# Altium PCB PCB1.PcbDoc
Units mil, origin at the board's own origin, x right, y up, seen from the top; angles counter-clockwise.
Board outline 3490.03 x 1315.02 mil, 2 copper layers (Top Layer, Bottom Layer); 35 components, 58 nets, 194 pads, 0 vias.
Unrouted connection lines stored in the file: 131.
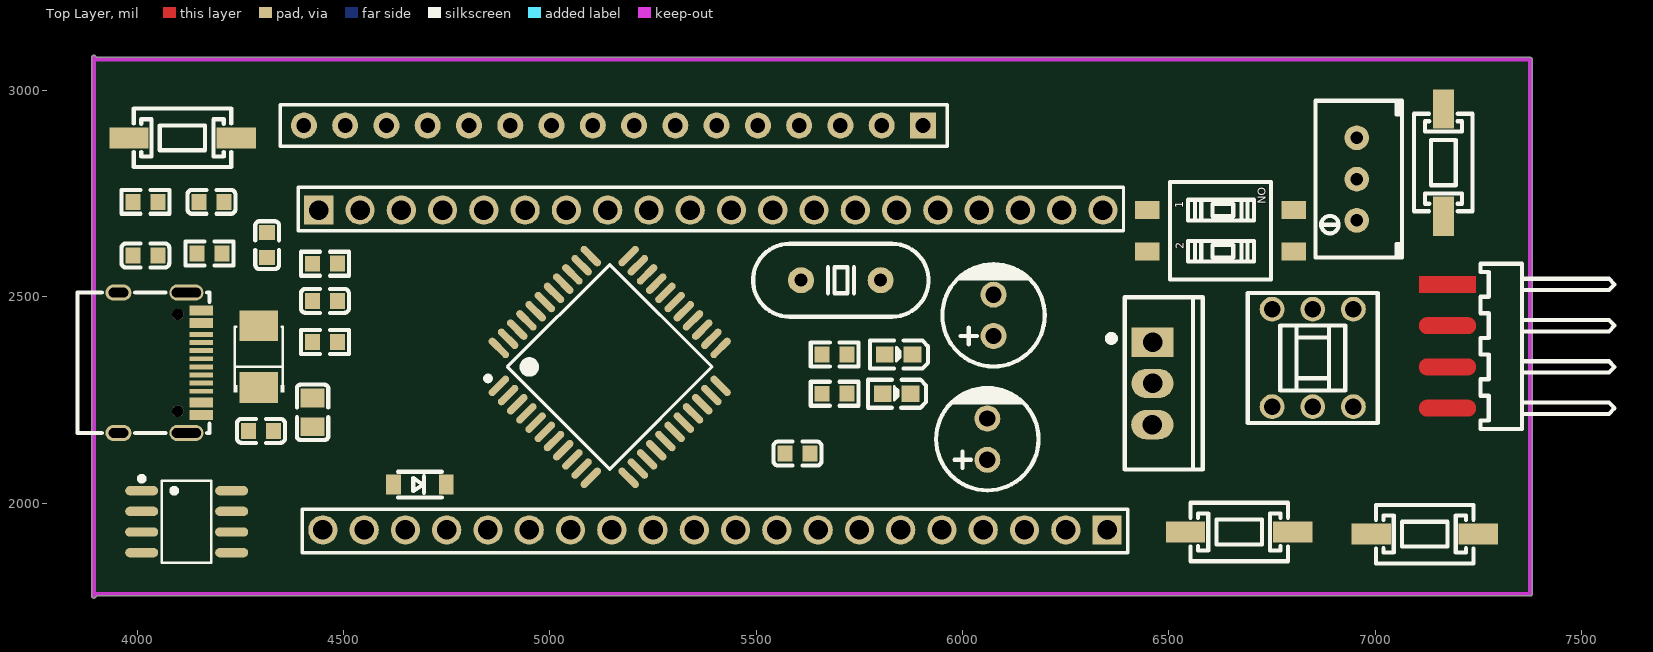
[diagram p0: Top Layer view]
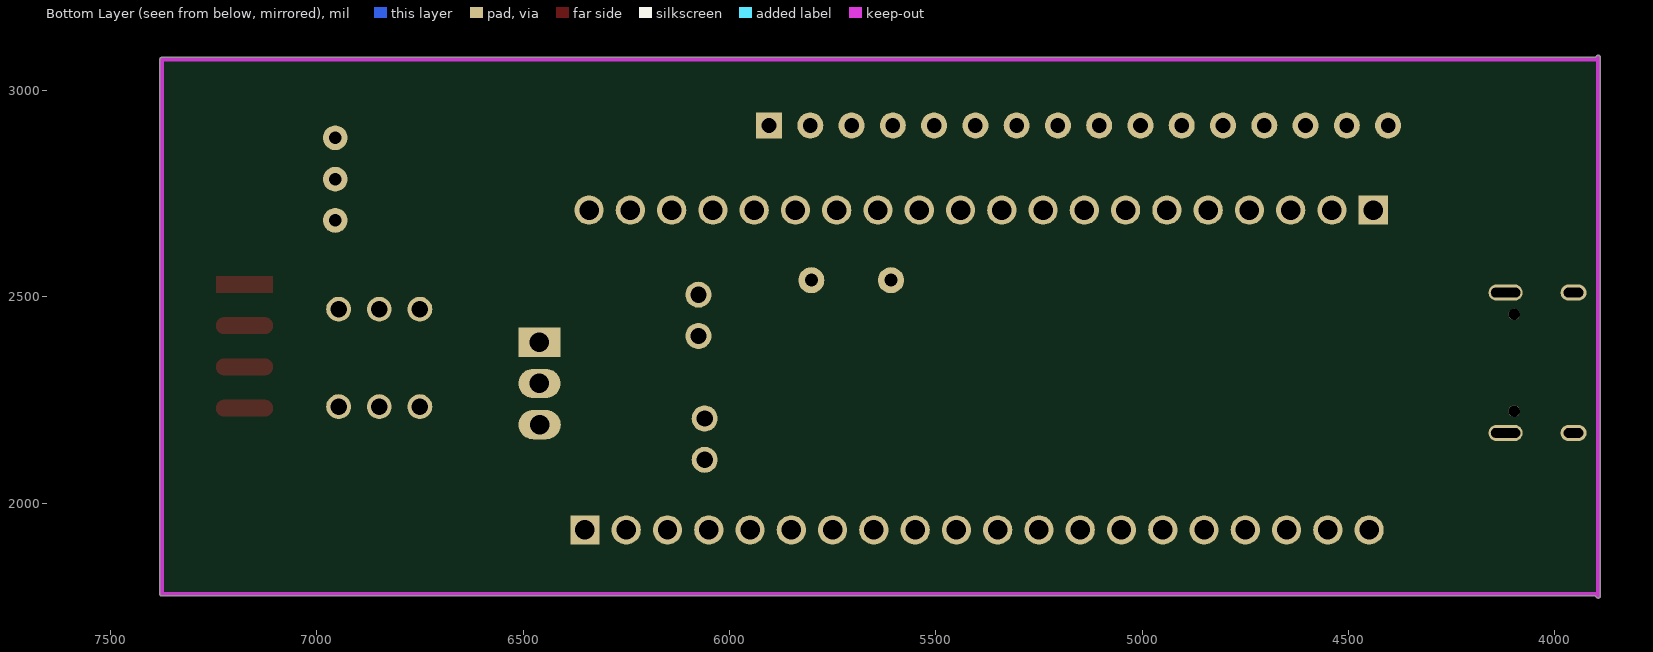
[diagram p1: Bottom Layer view, seen from below]

## Layer stack, top to bottom
Top Layer: signal copper 1.4
Dielectric: dielectric 12.6, FR-4, Dk 4.8
Bottom Layer: signal copper 1.4

## Board outline
3889.99,1775 ccw(c3895,1775) 3898.56,1771.47 3898.55,1771.45 3902.08,1774.98 7375,1774.98 ccw(c7375,1780) 7380.02,1780 7380.02,3075 ccw(c7375,3075) 7375,3080.01 3902.08,3080.01 3898.55,3083.55 3898.56,3083.53 ccw(c3895,3080) 3889.99,3080

## Design rules (kind name [scope] priority, off if disabled: settings)
Clearance [All] p1: gap=10
PolygonConnect [All] p1: connectstyle=Relief reliefconductorwidth=10 reliefentries=4 polygonreliefangle="90 Angle" airgapwidth=10
RoutingVias [All] p1: holewidth=28 width=50 viastyle="Through Hole" minholewidth=28 minwidth=50 maxholewidth=28 maxwidth=50
SolderMaskExpansion [All] p1: expansion=4
Width [All] p1: maxlimit=10 minlimit=10 preferedwidth=10
28 further rules are at their usual default settings.

## Classes and differential pairs
component class Sheet1: ""

## Components (designator, comment, footprint, x,y, rotation, side; value= is the part's Value field where it differs from the comment)
C1 "0.1u" C0603 4180,2730 r180 top
C2 "0.1u" C0603 4020,2600 r0 top
C3 "100nF" C0603 4455,2490 r0 top
C4 "22pF" C0603 5600,2120 r0 top
C5 "22pF" C0603 4300,2175 r0 top
C6 "10uF" C0603 4315,2625 r270 top
C7 "1uF" CAP-SMD_L3.5-W2.8-R-RD 4295,2355 r90 top
C8 "47uF" CAP-TH_BD6.3-P2.50-D1.0-FD 6060,2155 r90 top
C9 "47uF" CAP-TH_BD6.3-P2.50-D1.0-FD 6075,2455 r90 top
D2 "B5819WS_C122855" SOD-123 4685,2045 r0 top
J1 "" HDR-TH_20P-P2.54-V-M-1 5400,1935 r180 top
J2 "" HDR-TH_20P-P2.54-V-M-1 5390,2710 r0 top
JP2 "CON-4P" HDR2.54-WS-4P 7175,2380 r270 top
LCD "LCM1602K" HDR-TH_16P-P2.54-V-F-1 5155,2915 r180 top
LED1 "ORH-R36A(0.6T)" LED-0603 5845,2360 r180 top
LED2 "ORH-R36A(0.6T)" LED-0603 5840,2265 r180 top
R1 "5.1k" R0603 4020,2730 r0 top
R2 "5.1k" R0603 4455,2580 r180 top
R3 "1.5K" R0603 5690,2265 r0 top
R4 "1.5K" R0603 5690,2360 r0 top
R5 "300" R0603 4175,2605 r0 top
R6 "10K" C0805 4425,2220 r90 top
R7 "10K" RES-ADJ-TH_3296W 6955,2785 r180 top
R8 "200" R0603 4455,2390 r180 top
S1 "" SW-SMD_L6.0-W3.5-LS8.2 7165,2825 r270 top
S2 "" SW-SMD_L6.0-W3.5-LS8.2 6670,1930 r180 top
S3 "" SW-SMD_L6.0-W3.5-LS8.2 7120,1925 r0 top
SW1 "ST-1186S" SW-SMD_L6.0-W3.5-LS8.2 4110,2885 r0 top
SW2 "XKB8080-Z" SW-TH_6PIN-L8.00-W8.00 6850,2350 r0 top
TYPE-C "TYPEC-304-BCP16" TYPEC-16P 4055,2340 r270 top
U1 "CH340N" SOP-8_L5.0-W4.0-P1.27-LS6.0-BL 4120,1955 r270 top
U2 "STC12C5A60S2-35I" LQFP-44_10X10X08P 5145,2330 r45 top
U3 "DSIC02LSGET" SW-SMD_4P-L6.0-W6.2-P2.54-LS9.8 6625,2660 r0 top
U4 "LM7805T" TO-220-3_L10.0-W4.5-P2.54-L 6460,2290 r270 top
X1 "11.0592MHz" OSC-S49S 5705,2540 r180 top

## Footprints (in the part's own frame and the unit in brackets; to place one, negate y for a bottom-side part, rotate by r counter-clockwise, add the part's x,y. Pads: shape width x height; smd on the part's side, far side on the other; paste and mask are expansions set on the pad)
C0603 [mil]
  rect 36.61x38.58 smd: 1(-30.35,-0.1) 2(30.34,0.1)
  silkscreen extent -58,-29 58,29
C0805 [mil]
  rect 45.67x57.87 smd: 1(-35,0) 2(35,0)
  silkscreen extent -67,-38 67,38
CAP-SMD_L3.5-W2.8-R-RD [mm]
  rect 1.9x2.376 smd: 1(-1.899,0) 2(1.899,0)
  silkscreen extent -2.21,-1.55 1.83,1.55
CAP-TH_BD6.3-P2.50-D1.0-FD [mm]
  round 1.6 hole 1: 1(-1.27,0) 2(1.27,0)
  silkscreen extent -3.15,-3.15 3.18,3.15
HDR2.54-WS-4P [mil]
  round 0 smd: 1(-150,0) 2(-50,0) 3(50,0) 4(150,0)
  Top Layer region: 29.92,48.82 29.95,49.8 30.02,50.79 30.14,51.77 30.31,52.74 30.52,53.7 30.79,54.65 31.09,55.58 31.45,56.5 31.85,57.4 32.29,58.28 32.78,59.14 33.3,59.97 33.87,60.78 34.48,61.56 35.12,62.3 35.8,63.02 36.52,63.7 37.26,64.34 38.04,64.95 38.84,65.51 39.68,66.04 40.53,66.53 41.41,66.97 42.32,67.37 43.24,67.72 44.17,68.03 45.12,68.3 46.08,68.51 47.05,68.68 48.03,68.8 49.01,68.87 50,68.9 50.99,68.87 51.97,68.8 52.95,68.68 53.92,68.51 54.88,68.3 55.83,68.03 56.76,67.72 57.68,67.37 58.59,66.97 59.47,66.53 60.32,66.04 61.16,65.51 61.96,64.95 62.74,64.34 63.48,63.7 64.2,63.02 64.88,62.3 65.52,61.56 66.13,60.78 66.7,59.97 67.22,59.14 67.71,58.28 68.15,57.4 68.55,56.5 68.91,55.58 69.21,54.65 69.48,53.7 69.69,52.74 69.86,51.77 69.98,50.79 70.05,49.8 70.08,48.82 70.08,-48.82 70.05,-49.8 69.98,-50.79 69.86,-51.77 69.69,-52.74 69.48,-53.7 69.21,-54.65 68.91,-55.58 68.55,-56.5 68.15,-57.4 67.71,-58.28 67.22,-59.14 66.7,-59.97 66.13,-60.78 65.52,-61.56 64.88,-62.3 64.2,-63.02 63.48,-63.7 62.74,-64.34 61.96,-64.95 61.16,-65.51 60.32,-66.04 59.47,-66.53 58.59,-66.97 57.68,-67.37 56.76,-67.72 55.83,-68.03 54.88,-68.3 53.92,-68.51 52.95,-68.68 51.97,-68.8 50.99,-68.87 50,-68.9 49.01,-68.87 48.03,-68.8 47.05,-68.68 46.08,-68.51 45.12,-68.3 44.17,-68.03 43.24,-67.72 42.32,-67.37 41.41,-66.97 40.53,-66.53 39.68,-66.04 38.84,-65.51 38.04,-64.95 37.26,-64.34 36.52,-63.7 35.8,-63.02 35.12,-62.3 34.48,-61.56 33.87,-60.78 33.3,-59.97 32.78,-59.14 32.29,-58.28 31.85,-57.4 31.45,-56.5 31.09,-55.58 30.79,-54.65 30.52,-53.7 30.31,-52.74 30.14,-51.77 30.02,-50.79 29.95,-49.8 29.92,-48.82
  Top Layer region: -70.08,48.82 -70.05,49.8 -69.98,50.79 -69.86,51.77 -69.69,52.74 -69.48,53.7 -69.21,54.65 -68.91,55.58 -68.55,56.5 -68.15,57.4 -67.71,58.28 -67.22,59.14 -66.7,59.97 -66.13,60.78 -65.52,61.56 -64.88,62.3 -64.2,63.02 -63.48,63.7 -62.74,64.34 -61.96,64.95 -61.16,65.51 -60.32,66.04 -59.47,66.53 -58.59,66.97 -57.68,67.37 -56.76,67.72 -55.83,68.03 -54.88,68.3 -53.92,68.51 -52.95,68.68 -51.97,68.8 -50.99,68.87 -50,68.9 -49.01,68.87 -48.03,68.8 -47.05,68.68 -46.08,68.51 -45.12,68.3 -44.17,68.03 -43.24,67.72 -42.32,67.37 -41.41,66.97 -40.53,66.53 -39.68,66.04 -38.84,65.51 -38.04,64.95 -37.26,64.34 -36.52,63.7 -35.8,63.02 -35.12,62.3 -34.48,61.56 -33.87,60.78 -33.3,59.97 -32.78,59.14 -32.29,58.28 -31.85,57.4 -31.45,56.5 -31.09,55.58 -30.79,54.65 -30.52,53.7 -30.31,52.74 -30.14,51.77 -30.02,50.79 -29.95,49.8 -29.92,48.82 -29.92,-48.82 -29.95,-49.8 -30.02,-50.79 -30.14,-51.77 -30.31,-52.74 -30.52,-53.7 -30.79,-54.65 -31.09,-55.58 -31.45,-56.5 -31.85,-57.4 -32.29,-58.28 -32.78,-59.14 -33.3,-59.97 -33.87,-60.78 -34.48,-61.56 -35.12,-62.3 -35.8,-63.02 -36.52,-63.7 -37.26,-64.34 -38.04,-64.95 -38.84,-65.51 -39.68,-66.04 -40.53,-66.53 -41.41,-66.97 -42.32,-67.37 -43.24,-67.72 -44.17,-68.03 -45.12,-68.3 -46.08,-68.51 -47.05,-68.68 -48.03,-68.8 -49.01,-68.87 -50,-68.9 -50.99,-68.87 -51.97,-68.8 -52.95,-68.68 -53.92,-68.51 -54.88,-68.3 -55.83,-68.03 -56.76,-67.72 -57.68,-67.37 -58.59,-66.97 -59.47,-66.53 -60.32,-66.04 -61.16,-65.51 -61.96,-64.95 -62.74,-64.34 -63.48,-63.7 -64.2,-63.02 -64.88,-62.3 -65.52,-61.56 -66.13,-60.78 -66.7,-59.97 -67.22,-59.14 -67.71,-58.28 -68.15,-57.4 -68.55,-56.5 -68.91,-55.58 -69.21,-54.65 -69.48,-53.7 -69.69,-52.74 -69.86,-51.77 -69.98,-50.79 -70.05,-49.8 -70.08,-48.82
  Top Layer region: -129.92,-68.9 -170.08,-68.9 -170.08,68.9 -129.92,68.9
  Top Layer region: 129.92,48.82 129.95,49.8 130.02,50.79 130.14,51.77 130.31,52.74 130.52,53.7 130.79,54.65 131.09,55.58 131.45,56.5 131.85,57.4 132.29,58.28 132.78,59.14 133.3,59.97 133.87,60.78 134.48,61.56 135.12,62.3 135.8,63.02 136.52,63.7 137.26,64.34 138.04,64.95 138.84,65.51 139.68,66.04 140.53,66.53 141.41,66.97 142.32,67.37 143.24,67.72 144.17,68.03 145.12,68.3 146.08,68.51 147.05,68.68 148.03,68.8 149.01,68.87 150,68.9 150.99,68.87 151.97,68.8 152.95,68.68 153.92,68.51 154.88,68.3 155.83,68.03 156.76,67.72 157.68,67.37 158.59,66.97 159.47,66.53 160.32,66.04 161.16,65.51 161.96,64.95 162.74,64.34 163.48,63.7 164.2,63.02 164.88,62.3 165.52,61.56 166.13,60.78 166.7,59.97 167.22,59.14 167.71,58.28 168.15,57.4 168.55,56.5 168.91,55.58 169.21,54.65 169.48,53.7 169.69,52.74 169.86,51.77 169.98,50.79 170.05,49.8 170.08,48.82 170.08,-48.82 170.05,-49.8 169.98,-50.79 169.86,-51.77 169.69,-52.74 169.48,-53.7 169.21,-54.65 168.91,-55.58 168.55,-56.5 168.15,-57.4 167.71,-58.28 167.22,-59.14 166.7,-59.97 166.13,-60.78 165.52,-61.56 164.88,-62.3 164.2,-63.02 163.48,-63.7 162.74,-64.34 161.96,-64.95 161.16,-65.51 160.32,-66.04 159.47,-66.53 158.59,-66.97 157.68,-67.37 156.76,-67.72 155.83,-68.03 154.88,-68.3 153.92,-68.51 152.95,-68.68 151.97,-68.8 150.99,-68.87 150,-68.9 149.01,-68.87 148.03,-68.8 147.05,-68.68 146.08,-68.51 145.12,-68.3 144.17,-68.03 143.24,-67.72 142.32,-67.37 141.41,-66.97 140.53,-66.53 139.68,-66.04 138.84,-65.51 138.04,-64.95 137.26,-64.34 136.52,-63.7 135.8,-63.02 135.12,-62.3 134.48,-61.56 133.87,-60.78 133.3,-59.97 132.78,-59.14 132.29,-58.28 131.85,-57.4 131.45,-56.5 131.09,-55.58 130.79,-54.65 130.52,-53.7 130.31,-52.74 130.14,-51.77 130.02,-50.79 129.95,-49.8 129.92,-48.82
  silkscreen extent -200,80 200,405
HDR-TH_16P-P2.54-V-F-1 [mm]
  rect 1.6x1.6 hole 0.9: 1(-19.025,0)
  round 1.6 hole 0.9: 2(-16.485,0) 3(-13.945,0) 4(-11.405,0) 5(-8.865,0) 6(-6.325,0) 7(-3.785,0) 8(-1.245,0) 9(1.295,0) 10(3.835,0) 11(6.375,0) 12(8.915,0) 13(11.455,0) 14(13.995,0) 15(16.535,0) 16(19.075,0)
  silkscreen extent -20.53,-1.27 20.53,1.27
HDR-TH_20P-P2.54-V-M-1 [mil]
  rect 70.9x70.9 hole 47.2 mask+2: 1(-950,0)
  round 70.9 hole 47.2 mask+2: 2(-850,0) 3(-750,0) 4(-650,0) 5(-550,0) 6(-450,0) 7(-350,0) 8(-250,0) 9(-150,0) 10(-50,0) 11(50,0) 12(150,0) 13(250,0) 14(350,0) 15(450,0) 16(550,0) 17(650,0) 18(750,0) 19(850,0) 20(950,0)
  silkscreen extent -1000,-50 1000,55
LED-0603 [mil]
  rect 43x39 smd: 1(33.5,0) 2(-33.5,0)
  silkscreen extent -72,-34 70,34
LQFP-44_10X10X08P [mm]
  oval 1.6x0.45 smd: 1(-5.649,4) 2(-5.649,3.2) 3(-5.649,2.4) 4(-5.649,1.6) 5(-5.649,0.8) 6(-5.649,0) 7(-5.649,-0.8) 8(-5.649,-1.6) 9(-5.649,-2.4) 10(-5.649,-3.2) 11(-5.649,-4) 23(5.649,-4) 24(5.649,-3.2) 25(5.649,-2.4) 26(5.649,-1.6) 27(5.649,-0.8) 28(5.649,0) 29(5.649,0.8) 30(5.649,1.6) 31(5.649,2.4) 32(5.649,3.2) 33(5.649,4)
  oval 0.45x1.6 smd: 12(-4,-5.649) 13(-3.2,-5.649) 14(-2.4,-5.649) 15(-1.6,-5.649) 16(-0.8,-5.649) 17(0,-5.649) 18(0.8,-5.649) 19(1.6,-5.649) 20(2.4,-5.649) 21(3.2,-5.649) 22(4,-5.649) 34(4,5.649) 35(3.2,5.649) 36(2.4,5.649) 37(1.6,5.649) 38(0.8,5.649) 39(0,5.649) 40(-0.8,5.649) 41(-1.6,5.649) 42(-2.4,5.649) 43(-3.2,5.649) 44(-4,5.649)
  silkscreen extent -5.95,-4.45 4.45,4.95
OSC-S49S [mm]
  round 1.6 hole 0.8: 1(-2.45,0) 2(2.45,0)
  silkscreen extent -5.39,-2.25 5.39,2.25
R0603 [mil]
  rect 36.61x38.58 smd: 1(-30.35,-0.1) 2(30.34,0.1)
  silkscreen extent -58,-29 58,29
RES-ADJ-TH_3296W [mil]
  round 60 hole 30: 1(0,100) 2(0,0) 3(0,-100)
  silkscreen extent -110,-190 100,190
SOD-123 [mil]
  rect 35.8x48 smd: 1(-64,0) 2(64,0)
  silkscreen extent -53,-31 53,31
SOP-8_L5.0-W4.0-P1.27-LS6.0-BL [mil]
  oval 22.6x80.14 smd: 1(-75,-108.97) 2(-25,-108.97) 3(25,-108.97) 4(75,-108.97) 5(75,108.97) 6(25,108.97) 7(-25,108.97) 8(-75,108.97)
  silkscreen extent -110,-115 99,60
SW-SMD_4P-L6.0-W6.2-P2.54-LS9.8 [mm]
  rect 1.5x1.1 smd: 1(-4.5,1.27) 2(-4.5,-1.27) 3(4.5,-1.27) 4(4.5,1.27)
  silkscreen extent -3.1,-3.01 3.1,3.01
SW-SMD_L6.0-W3.5-LS8.2 [mm]
  rect 2.42x1.28 smd: 1(3.296,0) 2(-3.296,0)
  silkscreen extent -3.01,-1.8 2.99,1.8
SW-TH_6PIN-L8.00-W8.00 [mil]
  round 60 hole 39.37: 1(-100,-116.22) 2(-1.57,-116.22) 3(96.85,-116.22) 4(-100,120) 5(-1.57,120) 6(96.85,120)
  silkscreen extent -159,-156 156,159
TO-220-3_L10.0-W4.5-P2.54-L [mm]
  rect 1.8x2.6 hole 1.2: 1(-2.54,0.005)
  oval 1.8x2.6 hole 1.2: 2(0,0.005) 3(2.54,-0.005)
  silkscreen extent -5.3,-2.73 5.3,3.09
TYPEC-16P [mm]
  oval 1x2.1 hole 0.6 slot 1.8 at 90 deg: 13(-4.32,1.633) 14(4.32,1.633)
  oval 1x1.6 hole 0.6 slot 1.2 at 90 deg: 15(-4.32,-2.547) 16(4.32,-2.547)
  rect 0.6x1.45 smd: A1B12(-3.225,2.548) A4B9(-2.45,2.548) B1A12(3.22,2.548) B4A9(2.45,2.548)
  rect 0.3x1.45 smd: A5(-1.25,2.547) A6(-0.25,2.548) A7(0.25,2.548) A8(1.25,2.548) B5(1.75,2.548) B6(0.75,2.548) B7(-0.75,2.548) B8(-1.75,2.548)
  round 0.7 hole 0.7 unplated: ""(-2.98,1.102) ""(2.98,1.102)
  silkscreen extent -4.32,-5.08 4.32,3.05

## Part data
J1 J2: library part Header-Male-2.54_1x20
S1 S2 S3: library part SW-PB, "Switch"

## Nets (pads, with @x,y where several pads share a name; then routed paths per layer and width w, separated by ;. In a path a pad name is that pad's centre, name@x,y a point inside that pad or via, vN(x,y) a via of type N, cw(c..) or ccw(c..) an arc to the next point about the centre after c; other vN are vias at no path point)
GND: C1.1 C2.1 C3.1 C4.2 C5.2 C7.2 C8.2 C9.2 J1.20 JP2.1 LCD.1 LCD.16 R1.1 R2.1 R3.1 R6.1 R7.1 S2.1 S3.1 SW1.2 TYPE-C.13 TYPE-C.14 TYPE-C.15 TYPE-C.16 TYPE-C.A1B12 TYPE-C.A8 TYPE-C.B1A12 TYPE-C.B8 U1.3 U2.16 U4.2
NetC2_2: C2.2 U1.8
NetC4_1: C4.1 U2.15 X1.1
NetC5_1: C5.1 U2.14 X1.2
NetC6_1: C6.1 R6.2 S1.1 U2.4
NetD2_1: D2.1 U1.6
NetLCD_3: LCD.3 R7.2
NetLCD_15: LCD.15 R8.2
NetLED1_2: LED1.2 R4.2
NetLED2_2: LED2.2 R3.2
NetR1_2: R1.2 TYPE-C.B5
NetR2_2: R2.2 TYPE-C.A5
NetR5_1: R5.1 U1.7
P0.0: J2.2 LCD.7 U2.37
P0.1: J2.3 LCD.8 U2.36
P0.2: J2.4 LCD.9 U2.35
P0.3: J2.5 LCD.10 U2.34
P0.4: J2.6 LCD.11 U2.33
P0.5: J2.7 LCD.12 U2.32
P0.6: J2.8 LCD.13 U2.31
P0.7: J2.9 LCD.14 U2.30
P1.0: J1.1 U2.40
P1.1: J1.2 U2.41
P1.2: J1.3 U2.42
P1.3: J1.4 U2.43
P1.4: J1.5 U2.44
P1.5: J1.6 U2.1
P1.6: J1.7 U2.2
P1.7: J1.8 U2.3
P2.0: J2.20 SW1.1 U2.18
P2.1: J2.19 U2.19
P2.2: J2.18 U2.20
P2.3: J2.17 U2.21
P2.4: J2.16 U2.22
P2.5: J2.15 LCD.4 U2.23
P2.6: J2.14 LCD.5 U2.24
P2.7: J2.13 LCD.6 U2.25
P3.0: J1.10 R5.2 U2.5 U3.1
P3.1: D2.2 J1.11 U2.7 U3.2
P3.2: J1.12 U2.8
P3.3: J1.13 S2.2 U2.9
P3.4: J1.14 S3.2 U2.10
P3.5: J1.15 U2.11
P3.6: J1.16 U2.12
P3.7: J1.17 U2.13
P4.0: R4.1 U2.17
P4.1: J1.19 U2.28
P4.2: J1.9 U2.39
P4.3: J1.18 U2.6
P4.4: J2.12 U2.26
P4.5: J2.11 U2.27
P4.6: J2.10 U2.29
RX: JP2.2 U3.4
SW-VCC: C1.2 C3.2 C6.2 C7.1 C8.1 C9.1 LCD.2 LED1.1 LED2.1 R7.3 R8.1 S1.2 SW2.2 SW2.5 TYPE-C.A4B9 TYPE-C.B4A9 U1.5 U2.38 U4.1 U4.3
TX: JP2.3 U3.3
UD+: TYPE-C.A6 TYPE-C.B6 U1.1
UD-: TYPE-C.A7 TYPE-C.B7 U1.2
VCC: J2.1 JP2.4 SW2.3 SW2.4
pads on no net: SW2.1 SW2.6 TYPE-C. U1.4

## Keep-outs
Keep-Out Layer:
  lines w10: 3915,3075 7375,3075 7375,1780 3900,1780 3895,1775 3895,3080 3900,3075 3925,3075

## Text inside footprints (layer, text, board x,y; h text height)
U3: Top Overlay "ON" at 6715.16,2765 h19.68 r270; Top Overlay "1" at 6534.85,2715 h19.68 r90; Top Overlay "2" at 6535.55,2615 h19.68 r90